# Allegro board trackitboard-10milnew.brd
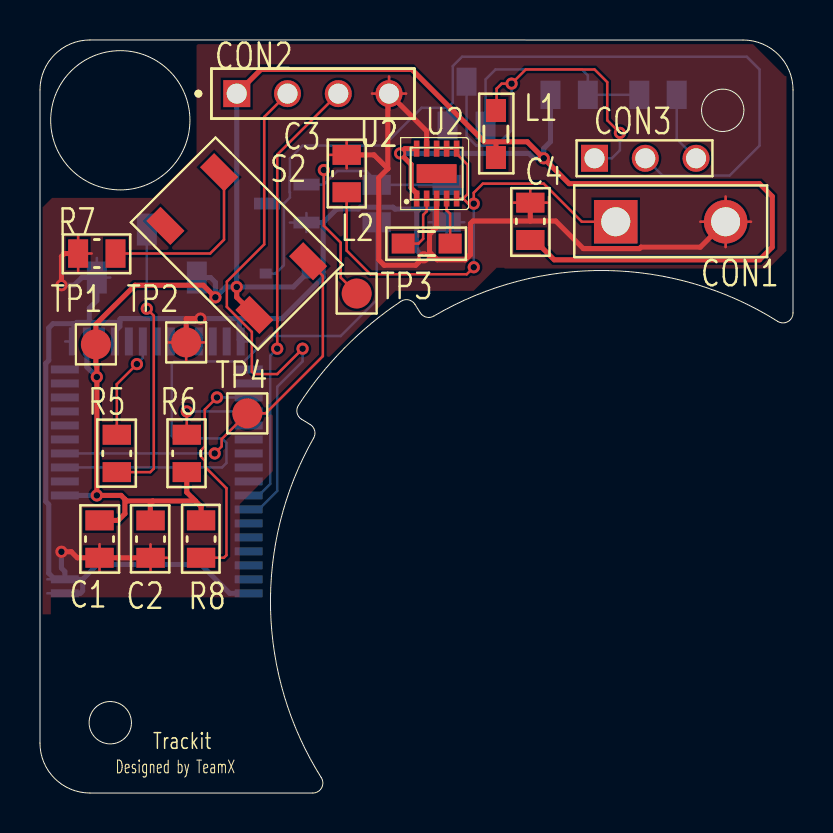
[diagram p0: board, top side]
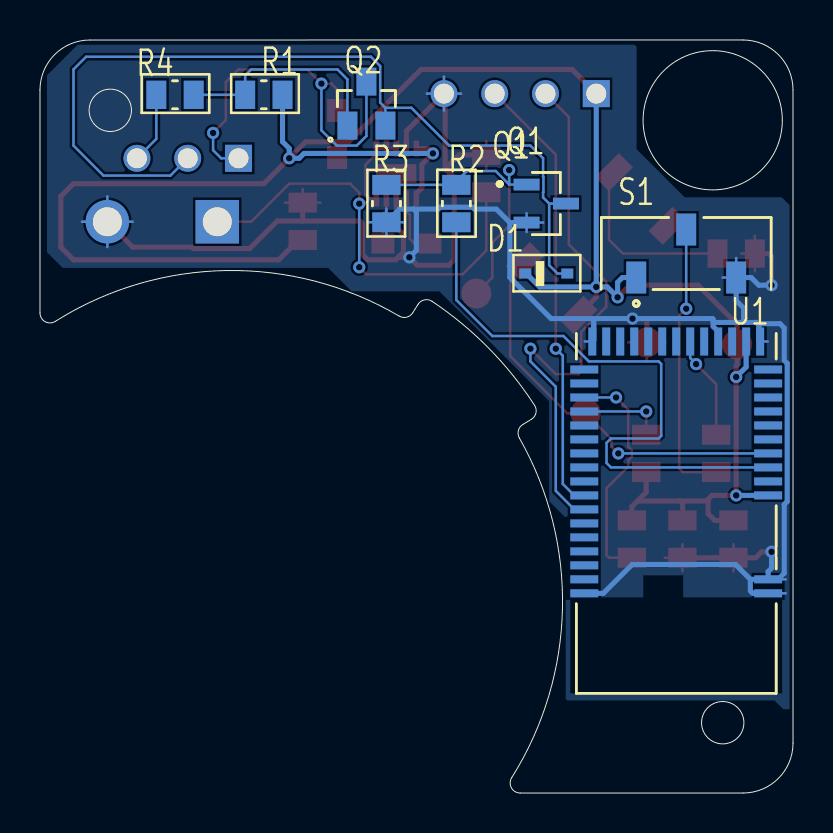
[diagram p1: board, bottom side, seen from below]

Outline 37.68 x 37.67 mm; copper layers: TOP, BOTTOM. Coordinates in mm from the lower left corner of the outline.
Outline path: circle c3.52,3.52 r1.06 ; circle c4.02,33.66 r3.48 ; circle c34.16,34.16 r1.06 ; 0,2.5 0,35.18 arc(0.73,36.94) 2.5,37.67 35.18,37.67 arc(36.94,36.94) 37.68,35.17 37.67,24.02 arc(37.42,23.58) 36.91,23.6 arc(28.34,26.14) 19.7,23.86 arc(19.33,23.81) 19.03,24.03 18.76,24.45 arc(18.44,24.67) 18.06,24.6 arc(15.23,22.26) 12.93,19.4 arc(12.86,19.01) 13.09,18.7 13.52,18.44 arc(13.74,18.14) 13.69,17.76 arc(11.54,9.21) 14.08,0.77 arc(14.09,0.26) 13.65,0 2.5,0 arc(0.73,0.73) 0,2.5

## Placement (name value [footprint] x y rotation side)
C1  1uF  [RESC2012X60N]  2.98 12.71 90 top
C2  1uF  [RESC2012X60N]  5.53 12.7 270 top
C3  4.7uF  [RESC2012X60N]  15.34 30.99 90 top
C4  10uF  [RESC2012X60N]  24.53 28.6 90 top
CON1  0039296028  [MOLEX_0039296028]  31.55 28.58 90 top
CON2  2-104186-1  [TE_1987374-4]  9.84 34.99 0 top
CON3  826948-3  [CON3NEW]  27.74 31.76 0 top
D1  1N4148WSQ-7-F  [SOD2513X120N]  12.34 25.99 180 bottom
L1  20uH  [INDC2012X87N]  22.81 32.97 270 top
L2  1.5uH  [INDC2012X87N]  19.34 27.49 0 top
Q1  WNM2016-3-TR  [SOT95P240X115-3N]  12.34 29.49 180 bottom
Q2  MMBT3904  [SOT95P240X120-3N]  21.34 34.49 180 bottom
R1  1K  [RESC2012X60N]  26.47 34.93 180 bottom
R2  1K  [RESC2012X60N]  16.84 29.49 90 bottom
R3  47K  [RESC2012X60N]  20.34 29.49 90 bottom
R4  1K  [RESC2012X60N]  30.92 34.93 180 bottom
R5  2K  [RESC2012X60N]  3.84 16.99 270 top
R6  100K  [RESC2012X60N]  7.34 16.99 270 top
R7  1K  [RESC2012X60N]  2.84 26.99 180 top
R8  100K  [RESC2012X60N]  8.06 12.71 270 top
S1  JS102011JCQN  [SW_JS102011JCQN]  5.34 26.99 180 bottom
S2  TL3342F160QG  [SW_TL3342F160QG]  9.84 27.49 135 top
TP1  TEST POINT  [TEST_POINT1]  2.8 22.45 0 top
TP2  TEST POINT  [TEST_POINT1]  7.31 22.54 0 top
TP3  TEST POINT  [TEST_POINT1]  15.84 24.99 0 top
TP4  TEST POINT  [TEST_POINT1]  10.37 18.99 0 top
U1  MDBT40-256RV3  [MODULE_MDBT40-256RV3]  5.84 13.99 0 bottom
U2  TPS63031  [10SON]  19.84 30.99 0 top

## Library data of the parts
C1-C4 = Cap- 0805
CON1 = 2-pin Connector_0
CON2 = Pin Header_0
CON3 = 826948-3_3
D1 = 1N4148WSQ-7-F_3
L1 L2 = Inductor
Q1 = N Channel MOSFET
Q2 = Transistor
R1-R8 = Resisitor - 0805
S1 = JS102011JCQN
S2 = Push Button
TP1-TP4 = TEST POINT
U1 = Bluetooth_4
U2 = TPS63031

## Footprints (pads in the part's own frame, mm; a bottom-side part is the same pattern mirrored in y, then rotated)
10SON
  rect 0.28x0.8 smd: 1(-1,-1.25) 2(-0.5,-1.25) 3(0,-1.25) 4(0.5,-1.25) 5(1,-1.25) 6(1,1.25) 7(0.5,1.25) 8(0,1.25) 9(-0.5,1.25) 10(-1,1.25)
  rect 2x0.95 smd: EXP(0,0)
CON3NEW
  rect 1.35x1.35 hole 1: 1(0,0)
  round 1.35 hole 1: 2(2.54,0) 3(5.08,0)
INDC2012X87N
  rect 1.15x1 smd: 1(-1.175,0) 2(1.175,0)
MODULE_MDBT40-256RV3
  rect 1.4x0.4 smd: 1(-4.6,4) 2(-4.6,3.3) 3(-4.6,-0.9) 4(-4.6,-1.6) 5(-4.6,-2.3) 6(-4.6,-3) 7(-4.6,-3.7) 8(-4.6,-4.4) 9(-4.6,-5.1) 10(-4.6,-5.8) 11(-4.6,-6.5) 12(-4.6,-7.2) 26(4.6,-7.2) 27(4.6,-6.5) 28(4.6,-5.8) 29(4.6,-5.1) 30(4.6,-4.4) 31(4.6,-3.7) 32(4.6,-3) 33(4.6,-2.3) 34(4.6,-1.6) 35(4.6,-0.9) 36(4.6,-0.2) 37(4.6,0.5) 38(4.6,1.2) 39(4.6,1.9) 40(4.6,2.6) 41(4.6,3.3) 42(4.6,4)
  rect 0.4x1.4 smd: 13(-4.2,-8.6) 14(-3.5,-8.6) 15(-2.8,-8.6) 16(-2.1,-8.6) 17(-1.4,-8.6) 18(-0.7,-8.6) 19(0,-8.6) 20(0.7,-8.6) 21(1.4,-8.6) 22(2.1,-8.6) 23(2.8,-8.6) 24(3.5,-8.6) 25(4.2,-8.6)
MOLEX_0039296028
  rect 2.175x2.175 hole 1.45: 1(0,2.75)
  round 2.175 hole 1.45: 2(0,-2.75)
RESC2012X60N
  rect 1x1.42 smd: 1(-0.935,0) 2(0.935,0)
SOD2513X120N
  rect 0.6x0.5 smd: A(1.05,0) C(-1.05,0)
SOT95P240X115-3N
  rect 1.3x0.59 smd: 1(-0.985,0.95) 2(-0.985,-0.95) 3(0.985,0)
SOT95P240X120-3N
  rect 1x1.4 smd: 1(-0.95,-1.1) 2(0.95,-1.1) 3(0,1.1)
SW_JS102011JCQN
  rect 1x1.6 smd: 1(-2.5,-1.2) 2(0,1.2) 3(2.5,-1.2)
SW_TL3342F160QG
  rect 1.7x1 smd: 1(-3.15,-1.9) 2(3.15,-1.9) 3(-3.15,1.9) 4(3.15,1.9)
TE_1987374-4
  rect 1.35x1.35 hole 1: 1(0,0)
  round 1.35 hole 1: 2(2.54,0) 3(5.08,0) 4(7.62,0)
TEST_POINT1
  round 1.5 smd: 1(0,0)

## Nets
3.3V: C1.2 C2.1 C4.1 CON2.1(3.3V) D1.C L1.2 R1.2 R6.2 R8.1 S1.1 S2.3 TP1.1 U1.3(AVDD) U1.14(VDD) U2.1(VOUT) U2.10(FB)
GND_POWER: C1.1 C2.2 C3.2 C4.2 CON1.2(NEGATIVE) CON2.4(GND) Q1.2(S) R3.1 R7.2 S1.3 TP2.1 U1.1(GND) U1.2(GND__1) U1.13(GND__2) U1.16(P0.30) U1.25(GND__3) U1.42(GND__4) U2.3(PGND) U2.9(GND)
BUTTON: S2.1 TP4.1 U1.6(P0.23)
CTS_3V: R8.2 U1.28(P0.10)
MODE_3V: R5.1 U1.18(P0.01/AIN2)
RXD_3V: R6.1 U1.29(P0.11)
N17667: L2.2 U2.4(L1)
N17687: L2.1 U2.2(L2)
N24007: CON3.2(NEGATIVE) D1.A Q1.3(D) Q2.2(E)
N24041: CON3.3(FEEDBACK) R4.1
N24073: Q1.1(G) R2.2 R3.2 TP3.1
N25874: Q2.1(B) R1.1 R4.2
N25919: CON3.1(POSITIVE) L1.1 Q2.3(C)
N26385: C3.1 CON1.1(POSITIVE) U2.5(VIN) U2.6(EN) U2.7(PS/SYNC) U2.8(VINA)
N26541: CON2.2(SWCLK) U1.36(SWCLK)
N26545: CON2.3(SWDIO) U1.35(SWDIO/RESET)
N26606: R2.1 U1.5(P0.22)
N170631: R5.2 S1.2
N172990: R7.1 S2.2

Pads without a net: S2 4; U1 4 7 8 9 10 11 12 15 17 19 20 21 22 23 24 26 27 30 31 32 33 34 37 38 39 40 41; U2 EXP

## Via types
v1: diameter 0.61, hole 0.33, TOP to BOTTOM, 22 vias

## Routing (per net, layer and track width the routed paths; a pad name or vN(x,y) marks a point on that pad's centre or on a via; arc(x,y) is an arc through that point)
3.3V: length 108.6
  TOP w0.254: S2.3 9.84,24.8 v1(9.84,25.32) ; 22.81,32.58 22.23,32.58 18.61,36.2 11.05,36.2 CON2.1 ; 22.81,32.58 24.38,32.58 v1(25.2,31.76) 26.47,30.49 36,30.49 36.63,29.85 36.63,27.31 36,26.68 25.73,26.68 24.74,27.67 C4.1 ; 22.81,32.58 L1.2 ; 5.65,14.61 5.52,14.48 5.52,13.64 C2.1 ; 5.65,14.61 4.34,14.61 4.25,14.7 ; 5.65,14.61 7.78,14.61 ; 4.25,14.7 4.25,13.98 3.91,13.64 C1.2 ; 4.25,14.7 4.06,14.89 v1(2.84,14.89) v1(2.84,20.81) 2.84,21.37 2.8,21.42 TP1.1 2.8,23.45 4.75,25.41 8.17,25.41 v1(8.78,24.8) ; R8.1 8.06,14.33 7.78,14.61 ; R6.2 7.34,15.05 7.78,14.61 ; U2.10 18.26,32.24 v1(18.02,32) 18.57,31.45 18.57,30.27 18.84,30 U2.1
  BOTTOM w0.254: v1(18.02,32) 24.47,32 24.71,31.76 v1(25.2,31.76) 25.2,32.25 25.54,32.59 R1.2 ; S1.1 8.53,25.79 8.78,25.55 v1(8.78,24.8) 9.29,25.32 v1(9.84,25.32) ; v1(9.84,25.32) 12.67,25.32 13.34,25.99 D1.C ; v1(9.84,25.32) CON2.1 ; U1.3 v1(2.84,14.89) ; v1(2.84,20.81) 2.34,21.31 U1.14
GND_POWER: length 153.4
  TOP w0.127: R7.2 2.59,26.99 ; R7.2 1.91,26.1 ; R7.2 1.91,27.88 ; 33.04,28.58 CON1.2 ; CON1.2 34.3,27.31 ; CON1.2 34.3,29.85 ; CON1.2 35.57,28.58 ; 17.46,34.14 CON2.4 ; CON2.4 18.32,34.99 ; CON2.4 16.61,34.99 ; CON2.4 17.46,35.84 ; C4.2 25.42,29.54 ; C4.2 23.64,29.54 ; C4.2 24.53,30.21 ; 5.53,11.09 C2.2 ; C2.2 5.53,12.45 ; C2.2 6.42,11.77 ; 2.98,11.09 2.98,12.45 ; TP2.1 8.24,22.54 ; TP2.1 6.39,22.54 ; TP2.1 7.31,21.62 ; 3.88,11.77 3.88,11.77 ; 14.46,31.93 C3.2 ; C3.2 15.34,31.25 ; C3.2 15.34,32.6
  TOP w0.254: 19.75,26.8 19.88,26.68 21.28,26.68 21.54,26.93 21.54,28.49 21.67,28.62 24.53,28.62 ; 19.75,26.8 19.49,27.06 19.49,27.95 19.84,28.3 U2.3 ; 19.75,26.8 v1(19.2,26.8) 18.8,26.4 17.22,26.4 16.95,26.68 16.95,30.78 17.4,31.23 ; 17.4,31.23 17.4,34.93 CON2.4 19.34,33.11 U2.9 ; 17.4,31.23 16.71,31.93 C3.2 ; v1(1.07,12.07) 1.57,12.07 1.87,11.77 3.88,11.77 ; v1(1.07,25.41) 1.07,26.85 1.22,26.99 R7.2 ; TP2.1 7.31,23.73 v1(8.03,23.73) ; 24.53,28.62 C4.2 ; 24.53,28.62 25.8,28.62 27.18,27.24 30,27.24 30.07,27.31 33.03,27.31 CON1.2 ; 3.88,11.77 C2.2
  BOTTOM w0.127: 10.42,22.59 U1.25 10.04,23.47 ; 12.5,28.54 Q1.2 ; Q1.2 13.33,29.01 ; Q1.2 13.33,28.07 ; 1.64,23.47 U1.13 1.27,22.59 ; 17.46,34.14 CON2.4 ; CON2.4 18.32,34.99 ; CON2.4 16.61,34.99 ; CON2.4 17.46,35.84 ; 34.3,27.31 CON1.2 ; CON1.2 34.3,29.85 ; CON1.2 33.04,28.58 ; CON1.2 35.57,28.58 ; R3.1 21.23,28.56 ; R3.1 20.34,27.88 ; R3.1 19.46,28.56 ; R3.1 20.34,29.23 ; 2.12,10.69 U1.2 0.37,10.69 ; S1.3 3.52,25.79 ; S1.3 2.17,25.79 ; S1.3 2.84,26.77 ; 2.12,9.99 U1.1 0.37,9.99
  BOTTOM w0.254: 1.71,23.42 1.64,23.48 0.65,23.48 0.44,23.27 0.44,21.64 0.29,21.5 0.29,14.58 0.44,14.44 0.44,11 0.74,10.69 U1.2 ; 1.71,23.42 1.84,23.54 2.47,23.54 ; 1.71,23.42 1.71,22.65 U1.13 ; v1(19.2,26.8) 18.84,27.15 18.84,29.09 18.97,29.22 ; 18.97,29.22 17.75,29.22 17.66,29.31 16.03,29.31 15.94,29.22 14.84,29.22 14.17,28.54 ; 18.97,29.22 19.68,29.22 R3.1 ; 4,23.54 4,23.7 4.03,23.73 v1(8.03,23.73) 10.04,23.73 ; 4,23.54 2.47,23.54 ; 4,23.54 4,23.34 3.74,23.09 U1.16 ; 2.47,23.54 2.47,24.26 2.84,24.64 S1.3 2.09,25.79 1.71,25.41 v1(1.07,25.41) ; 2.13,10.69 2.13,10.12 2.01,9.99 U1.1 ; 2.13,10.69 U1.2 ; 2.13,10.69 2.88,11.44 8.05,11.44 9.49,9.99 U1.42 ; U1.2 1.24,11.08 1.07,11.25 v1(1.07,12.07) ; 10.04,23.73 9.96,23.65 9.96,22.67 U1.25 ; 10.04,23.73 12.1,23.73 14.17,25.8 14.17,28.54 ; 14.17,28.54 Q1.2
BUTTON: length 20.2
  TOP w0.127: v1(8.74,16.99) 9.09,17.34 9.09,17.71 TP4.1 10.37,19 11.29,19 14.15,21.86 14.15,25.87 S2.1
  BOTTOM w0.127: U1.6 v1(8.74,16.99)
CTS_3V: length 11.7
  TOP w0.127: R8.2 9.2,11.77 9.33,11.9 9.33,15.24 8.24,16.33 8.24,16.63 8.06,16.82 8.06,17.15 8.24,17.34 8.24,19.18 v1(8.85,19.79)
  BOTTOM w0.127: U1.28 v1(8.85,19.79)
MODE_3V: length 5.2
  TOP w0.127: R5.1 3.84,20.45 v1(4.85,21.46)
  BOTTOM w0.127: v1(4.85,21.46) 4.85,21.47 5.14,21.76 U1.18
RXD_3V: length 4.3
  TOP w0.127: R6.1 v1(7.34,19.09)
  BOTTOM w0.127: U1.29 v1(7.34,19.09)
N17667: length 2.3
  TOP w0.127: U2.4 20.34,29.15 20.52,28.97 L2.2
N17687: length 3.2
  TOP w0.127: L2.1 18.93,27.49 19.17,27.73 19.17,28.93 19.34,29.1 U2.2
N24007: length 45.7
  BOTTOM w0.127: 12.2,29.49 12.2,26.4 11.78,25.99 D1.A ; 12.2,29.49 12.5,29.79 12.5,30.05 12.49,30.07 12.49,30.81 12.5,30.83 12.5,31.76 13.14,32.39 17.2,32.39 19.09,34.28 20.39,34.28 ; 12.2,29.49 Q1.3 ; 20.39,34.28 20.65,34.54 20.65,36.37 21.12,36.84 35.36,36.84 36,36.2 36,32.39 34.5,30.89 31.15,30.89 CON3.2 ; 20.39,34.28 Q2.2
N24041: length 3.6
  BOTTOM w0.127: R4.1 31.85,32.73 CON3.3
N24073: length 15.3
  TOP w0.127: TP3.1 15.04,25.79 15.04,27.54 14.2,28.38 v1(14.2,31.17)
  BOTTOM w0.127: 14.2,30.44 14.88,31.12 16.31,31.12 16.84,30.59 ; 14.2,30.44 13.33,30.44 Q1.1 ; 14.2,30.44 14.2,30.44 v1(14.2,31.17) ; R3.2 17.01,30.43 16.84,30.59 ; 16.84,30.59 R2.2
N25874: length 11.3
  BOTTOM w0.127: Q2.1 22.29,35.7 22.79,36.2 27.11,36.2 27.41,35.9 R1.1 R4.2
N25919: length 20.2
  TOP w0.127: v1(29.01,33.03) 28.38,33.66 28.38,35.57 27.74,36.2 24.3,36.2 v1(23.59,35.49) 23.1,35.49 22.84,35.24 22.84,34.14 L1.1
  BOTTOM w0.127: CON3.1 28.61,31.76 29.01,32.16 v1(29.01,33.03) ; Q2.3 21.34,32.87 21.82,32.39 22.83,32.39 23.59,33.15 v1(23.59,35.49)
N26385: length 26.5
  TOP w0.127: U2.8 U2.7 U2.6 20.84,31.98 21.39,31.43 21.39,29.96 21.17,29.74 ; 21.17,29.74 U2.5 ; 21.17,29.74 21.43,29.49 v1(21.7,29.49) 21.7,30.03 22.16,30.49 25.2,30.49 27.11,28.58 CON1.1 ; C3.1 15.34,27.14 16.53,25.95 21.35,25.95 v1(21.7,26.3)
  BOTTOM w0.127: v1(21.7,29.49) v1(21.7,26.3)
N26541: length 28.2
  TOP w0.127: v1(13.14,22.23) 11.87,20.96 10.73,20.96 10.6,21.09 10.6,23.07 9.35,24.32 9.35,25.58 11.22,27.45 11.22,33.82 CON2.2
  BOTTOM w0.127: U1.36 10.94,14.19 11.87,15.12 11.87,20.33 13.14,21.6 v1(13.14,22.23)
N26545: length 22.3
  TOP w0.127: v1(11.87,22.23) 11.87,23.59 11.87,23.59 11.87,23.75 11.87,23.75 11.87,31.93 CON2.3
  BOTTOM w0.127: v1(11.87,22.23) 11.52,21.88 11.52,15.46 10.94,14.89 U1.35
N26606: length 31.1
  BOTTOM w0.127: R2.1 16.84,24.66 15.04,22.87 11.49,22.87 10.22,21.6 6.72,21.6 6.6,21.47 6.6,17.87 6.72,17.74 9.11,17.74 9.33,17.52 9.33,16.51 9.11,16.29 U1.5
N170631: length 14
  TOP w0.127: v1(5.34,24.23) 5.69,23.88 5.69,16.23 5.52,16.06 R5.2
  BOTTOM w0.127: S1.2 v1(5.34,24.23)
N172990: length 9.2
  TOP w0.127: R7.1 8.51,26.99 9.21,27.68 9.21,30.81 S2.2

## Copper pours and planes (outline as drawn; the poured copper is in the pictures)
GND_POWER on TOP: 0.13,8.94 0.13,29.3 0.61,29.78 5.66,29.78 7.83,31.95 7.83,37.4 7.9,37.47 35.67,37.47 37.27,35.87 37.35,35.87 37.35,27.13 36.46,26.24 23.26,26.24 23.22,26.28 22.85,26.28 21.69,25.12 17.83,25.12 17.81,25.14 11.65,18.99 11.65,16.11 9.99,14.45 9.99,8.98 9.95,8.94
GND_POWER on BOTTOM: 0.17,4.19 0.17,29.4 0.57,29.8 5.42,29.8 7.83,32.21 7.83,37.34 7.93,37.44 35.79,37.44 37.33,35.9 37.33,27.06 36.54,26.27 23.26,26.27 22.08,25.1 17.69,25.1 12.2,19.61 12.2,14.59 11.37,13.77 11.37,4.78 11.4,4.75 11.28,4.63 0.92,4.63 0.51,4.22 0.51,4.19

## Text on the board
Ref Des/Silkscreen Bottom: R1
Ref Des/Assembly Top: U2
Ref Des/Silkscreen Top: Designed by TeamX | Trackit | L2 | U2 | CON1
